# EAGLE board ExtensionBoard (EAGLE 6.5.0)
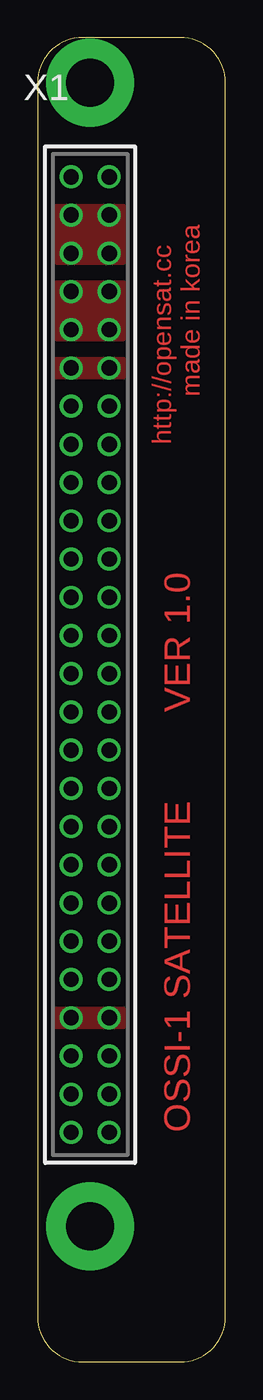
[diagram p0: board, top side]
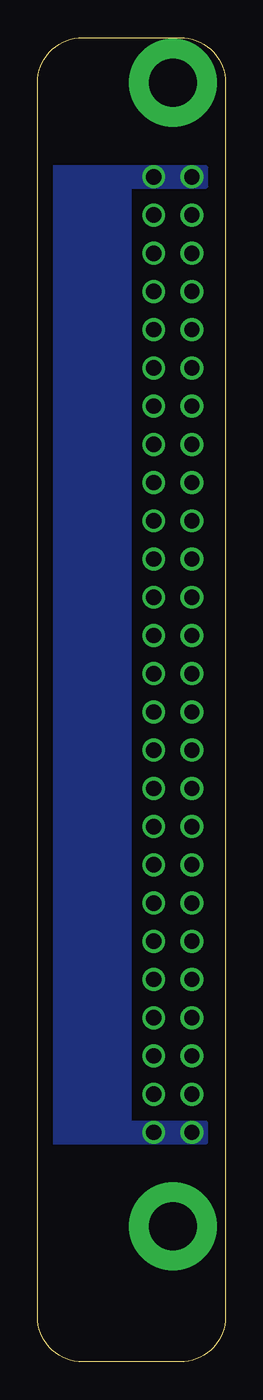
[diagram p1: board, bottom side, seen from below]

Size 12.5 x 88 mm. Coordinates in mm from the lower left corner, seen from the top.
Outline: 0,85 0,3
Outline: 0,3 arc90 3,0 9.5,0 arc90 12.5,3 12.5,85 arc90 9.5,88 3,88 arc90 0,85
Outline: 0,85 0,3
Outline: 0,85 0,3
Copper layers (1*16): Top 0.035mm / dielectric 1.5mm / Bottom 0.035mm
Design rules "default": minimum track width 10mil, minimum drill 24mil, track to track 8mil, track to pad 8mil, pad to pad 8mil, via to via 8mil, smd to smd 8mil, copper to edge 40mil, drill to drill 8mil, minimum pad ring 10mil, minimum via ring 8mil, stop-mask expansion 4mil, vias tented up to drill 0mil, thermal gap 10mil

## Footprints (pad centres in the part's own frame; a part is rotated, then mirrored left to right if it is on the bottom)
3.2-PAD-ROUND = drill 3.2 pad 5.842: B3,2 0,0
ESQ-126-XX-X-D = drill 1.016 pad 1.524: 1 -1.27,31.75; 2 1.27,31.75; 3 -1.27,29.21; 4 1.27,29.21; 5 -1.27,26.67; 6 1.27,26.67; 7 -1.27,24.13; 8 1.27,24.13; 9 -1.27,21.59; 10 1.27,21.59; 11 -1.27,19.05; 12 1.27,19.05; 13 -1.27,16.51; 14 1.27,16.51; 15 -1.27,13.97; 16 1.27,13.97; 17 -1.27,11.43; 18 1.27,11.43; 19 -1.27,8.89; 20 1.27,8.89; 21 -1.27,6.35; 22 1.27,6.35; 23 -1.27,3.81; 24 1.27,3.81; 25 -1.27,1.27; 26 1.27,1.27; 27 -1.27,-1.27; 28 1.27,-1.27; 29 -1.27,-3.81; 30 1.27,-3.81; 31 -1.27,-6.35; 32 1.27,-6.35; 33 -1.27,-8.89; 34 1.27,-8.89; 35 -1.27,-11.43; 36 1.27,-11.43; 37 -1.27,-13.97; 38 1.27,-13.97; 39 -1.27,-16.51; 40 1.27,-16.51; 41 -1.27,-19.05; 42 1.27,-19.05; 43 -1.27,-21.59; 44 1.27,-21.59; 45 -1.27,-24.13; 46 1.27,-24.13; 47 -1.27,-26.67; 48 1.27,-26.67; 49 -1.27,-29.21; 50 1.27,-29.21; 51 -1.27,-31.75; 52 1.27,-31.75

## Placement (x,y rotation side)
H2  MOUNT-PAD-ROUND3.2  [3.2-PAD-ROUND]  3.5,9 0 top
H3  MOUNT-PAD-ROUND3.2  [3.2-PAD-ROUND]  3.5,85 0 top
X1  ESQ-126-38-G-D  [ESQ-126-XX-X-D]  3.5,47 0 top

## Library data of the parts
H2 H3 X1 = OSSI

## Nets
3.3VOBC: X1.45 X1.46
ANT_DEPLOY1: X1.19
ANT_DEPLOY2: X1.20
BAT_-CHRG: X1.42
BAT_-FAULT: X1.44
BAT_-ON: X1.38
BAT_TEMP: X1.47
BEACON_-FAULT: X1.30
BEACON_OFF: X1.24
BEACON_SCL: X1.37
BEACON_SDA: X1.39
BUS_CS: X1.27
COMMS_-FAULT: X1.32
COMMS_OFF: X1.25
COMMS_SCL: X1.41
COMMS_SDA: X1.43
GND: X1.1 X1.2 X1.51 X1.52
LED_-FAULT: X1.28
LED_OFF: X1.23
LED_SCL: X1.33
LED_SDA: X1.35
OBC_-FAULT: X1.34
OBC_OFF: X1.26
PANELTEMP_SCL: X1.29
PANELTEMP_SDA: X1.31
SC_-ON: X1.40
SC_-PFO: X1.48
SCCHG_EN: X1.21
SCOUT_-PG: X1.50
SCOUT_EN: X1.22
SOLAR_-ON: X1.36
SOLAR_CS1: X1.15
SOLAR_CS2: X1.14
SOLAR_CS3: X1.17
SOLAR_CS4: X1.16
SOLAR_CS5: X1.18
SUPERCAP_TEMP: X1.49
VBAT: X1.11 X1.12
VBUS: X1.7 X1.8 X1.9 X1.10
VSOLAR: X1.3 X1.4 X1.5 X1.6
VSUPERCAP: X1.13

## Tracks (layer width: path | path; a pad name or v marks a point on that pad's centre or on a via)
3.3VOBC
  pour Top (no thermals): 1.27,23.5 5.71,23.5 5.71,22.23 1.27,22.23
GND
  pour Bottom (no thermals): 1.27,79.38 12.06,79.38 12.06,14.61 1.27,14.61 1.27,15.88 6.35,15.88 6.35,78.11 1.27,78.11
VBAT
  pour Top (no thermals): 1.27,66.67 5.71,66.67 5.71,65.41 1.27,65.41
VBUS
  pour Top (no thermals): 1.27,71.75 5.71,71.75 5.71,67.94 1.27,67.94
VSOLAR
  pour Top (no thermals): 1.27,76.83 5.71,76.83 5.71,73.03 1.27,73.03

## Text on the board
Top: made in korea | http://opensat.cc | VER 1.0 | OSSI-1 SATELLITE
tStop: made in korea | http://opensat.cc | VER 1.0 | OSSI-1 SATELLITE